# Altium PCB Mfd3.PcbDoc (part 1 of 2)
Units mm, origin at the board's own origin, x right, y up, seen from the top; angles counter-clockwise.
Board outline 190 x 263 mm, 2 copper layers (Top Layer, Bottom Layer), stack 1.671 mm thick; 173 components, 92 nets, 564 pads, 39 vias.
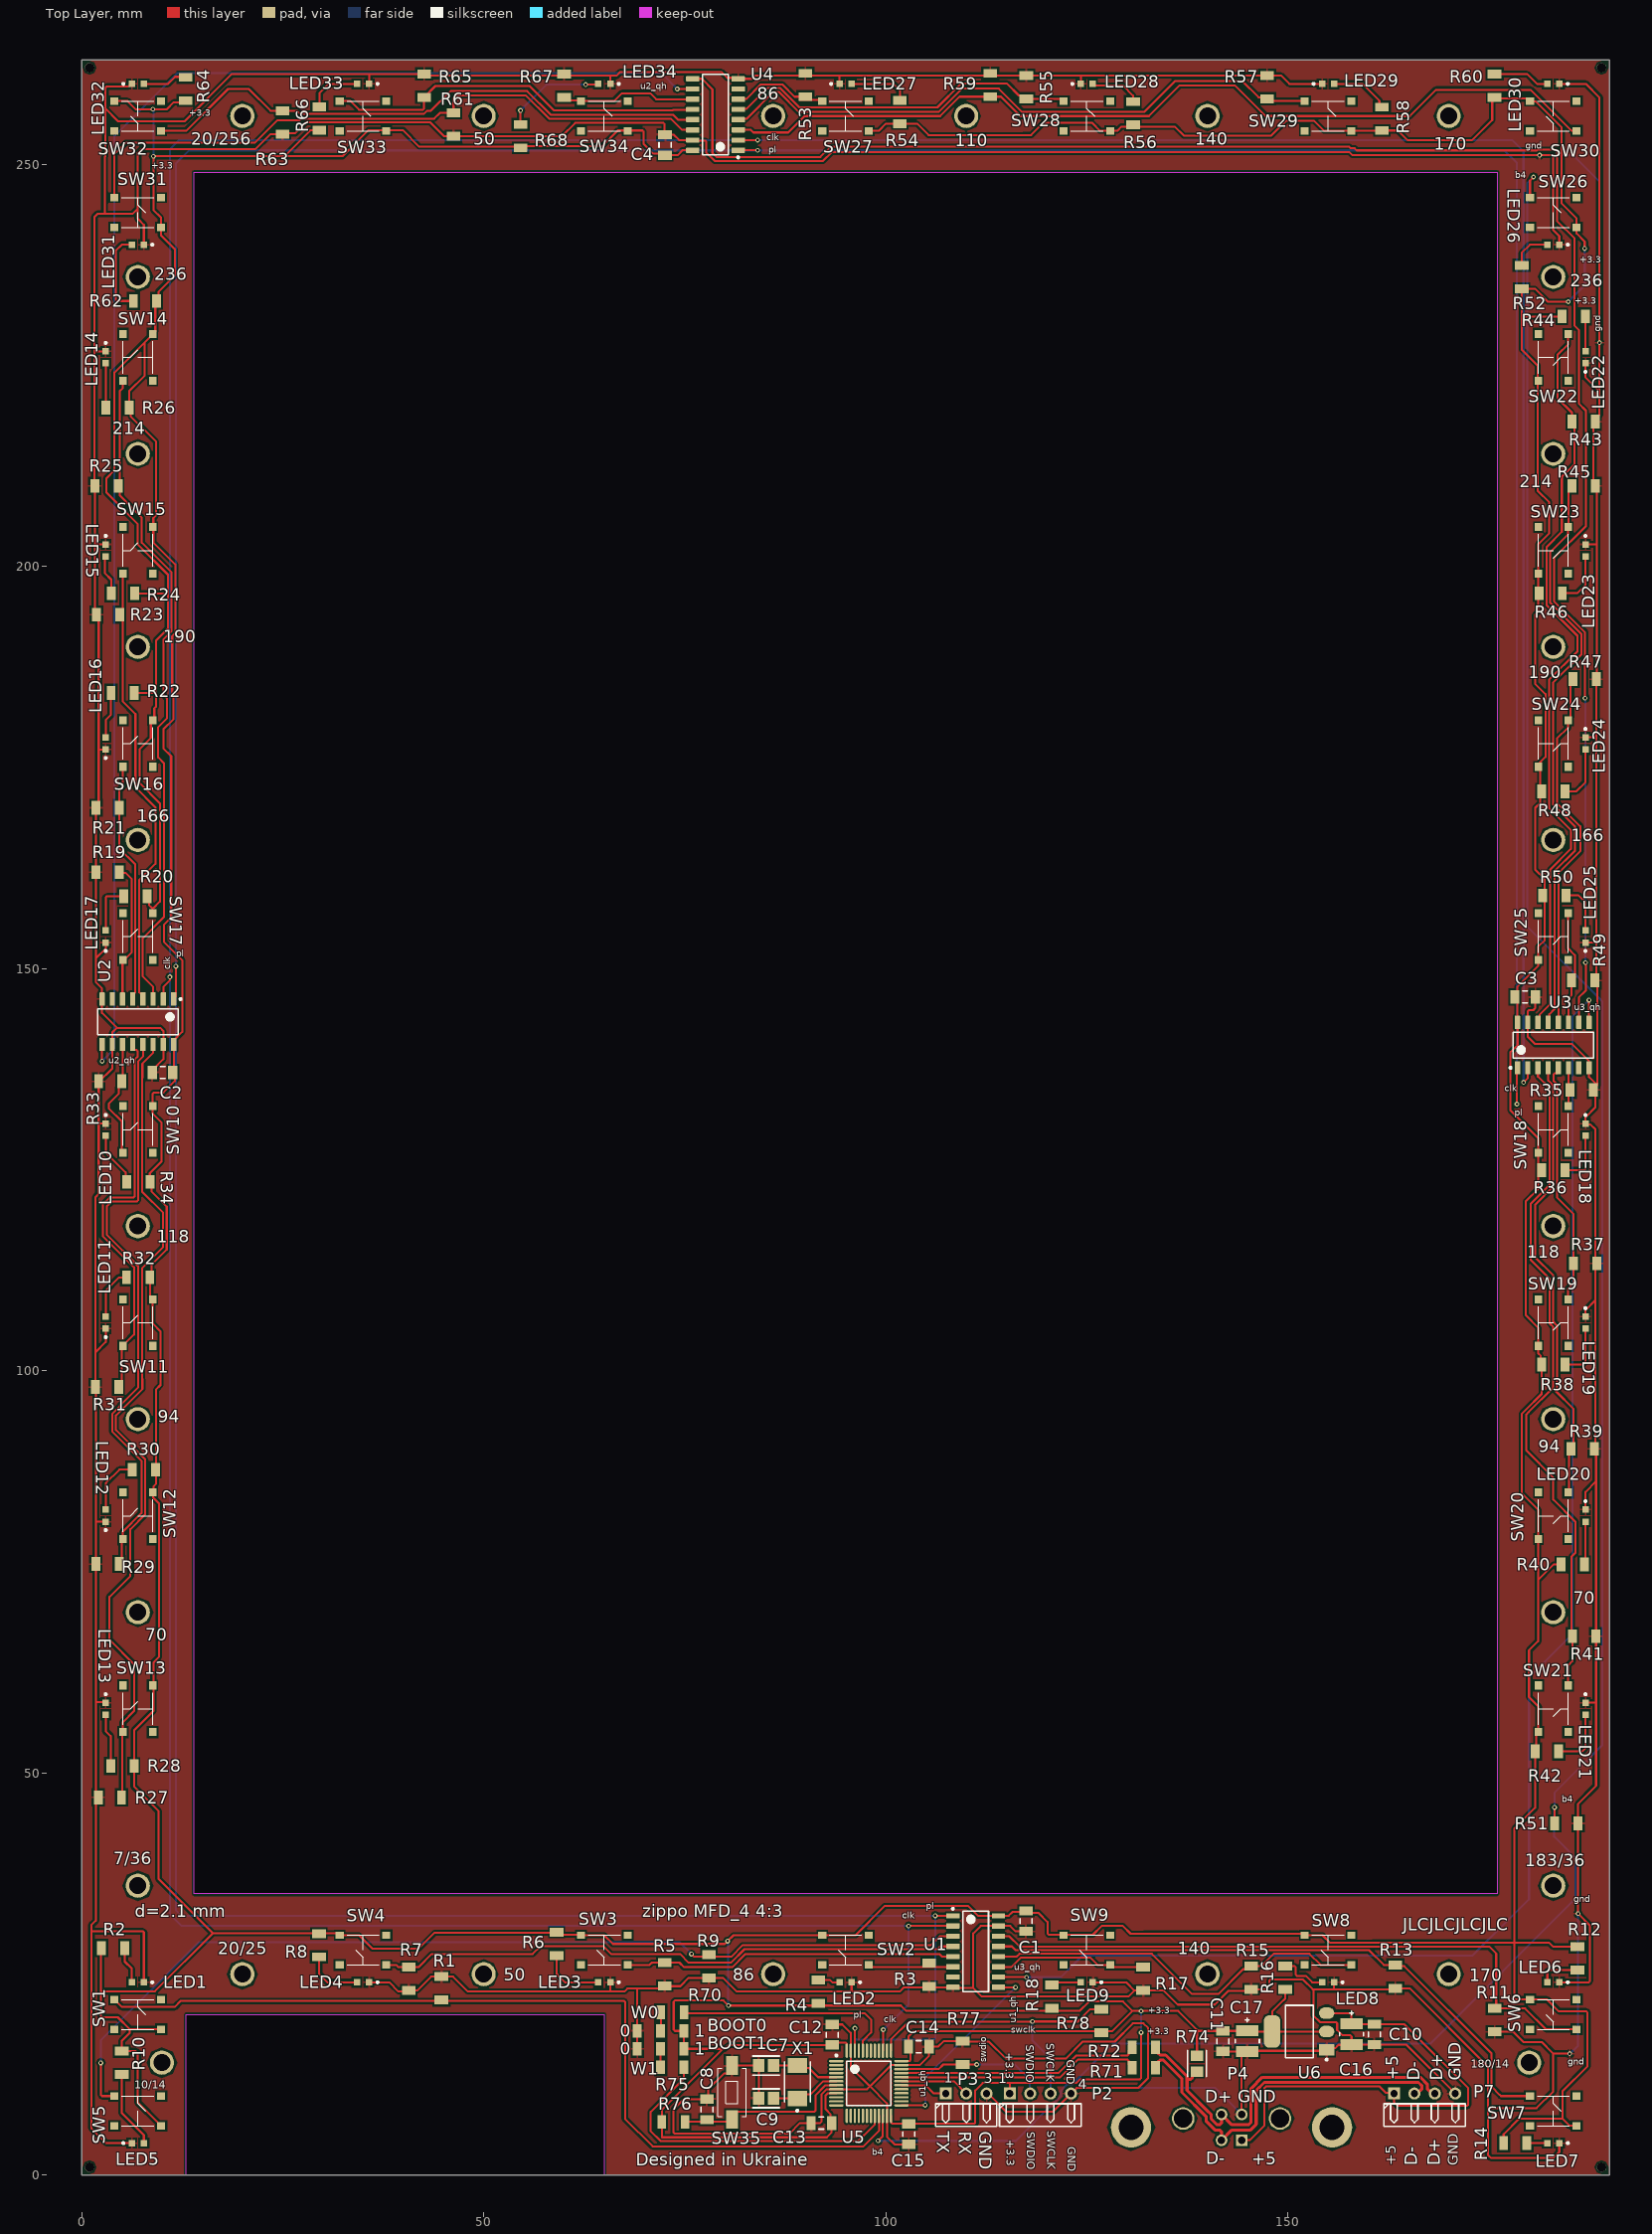
[diagram p0: Top Layer view]
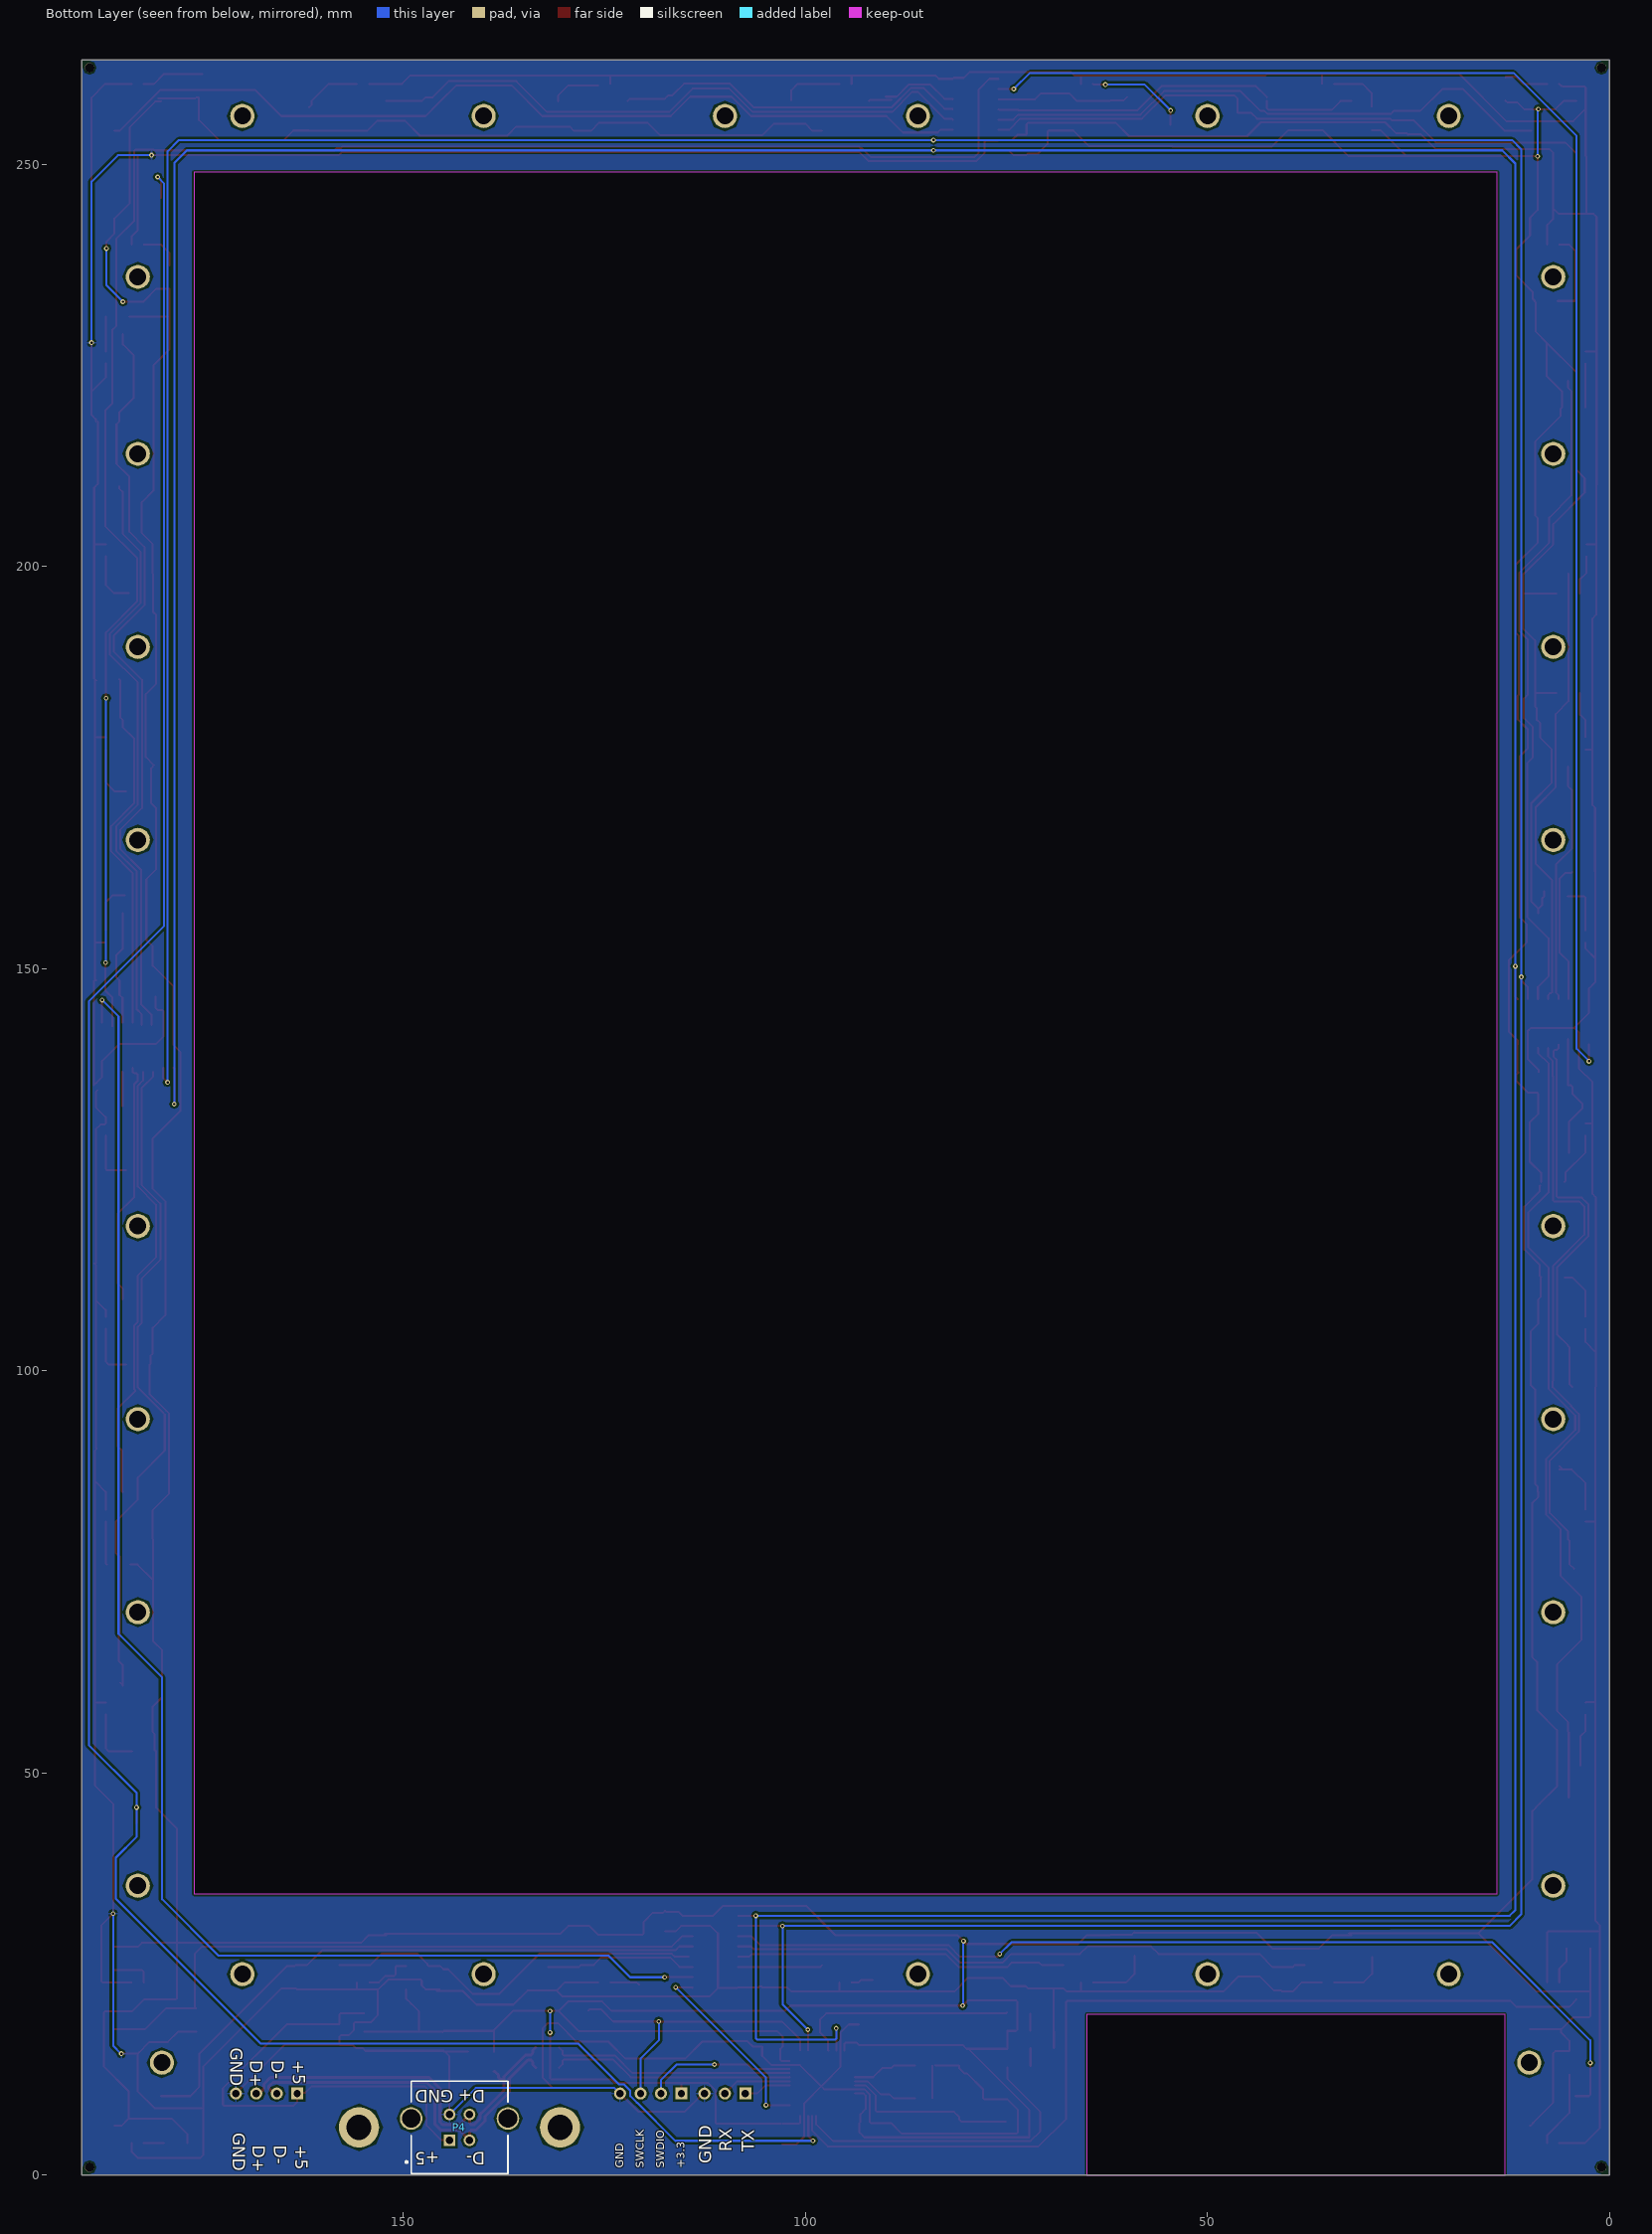
[diagram p1: Bottom Layer view, seen from below]
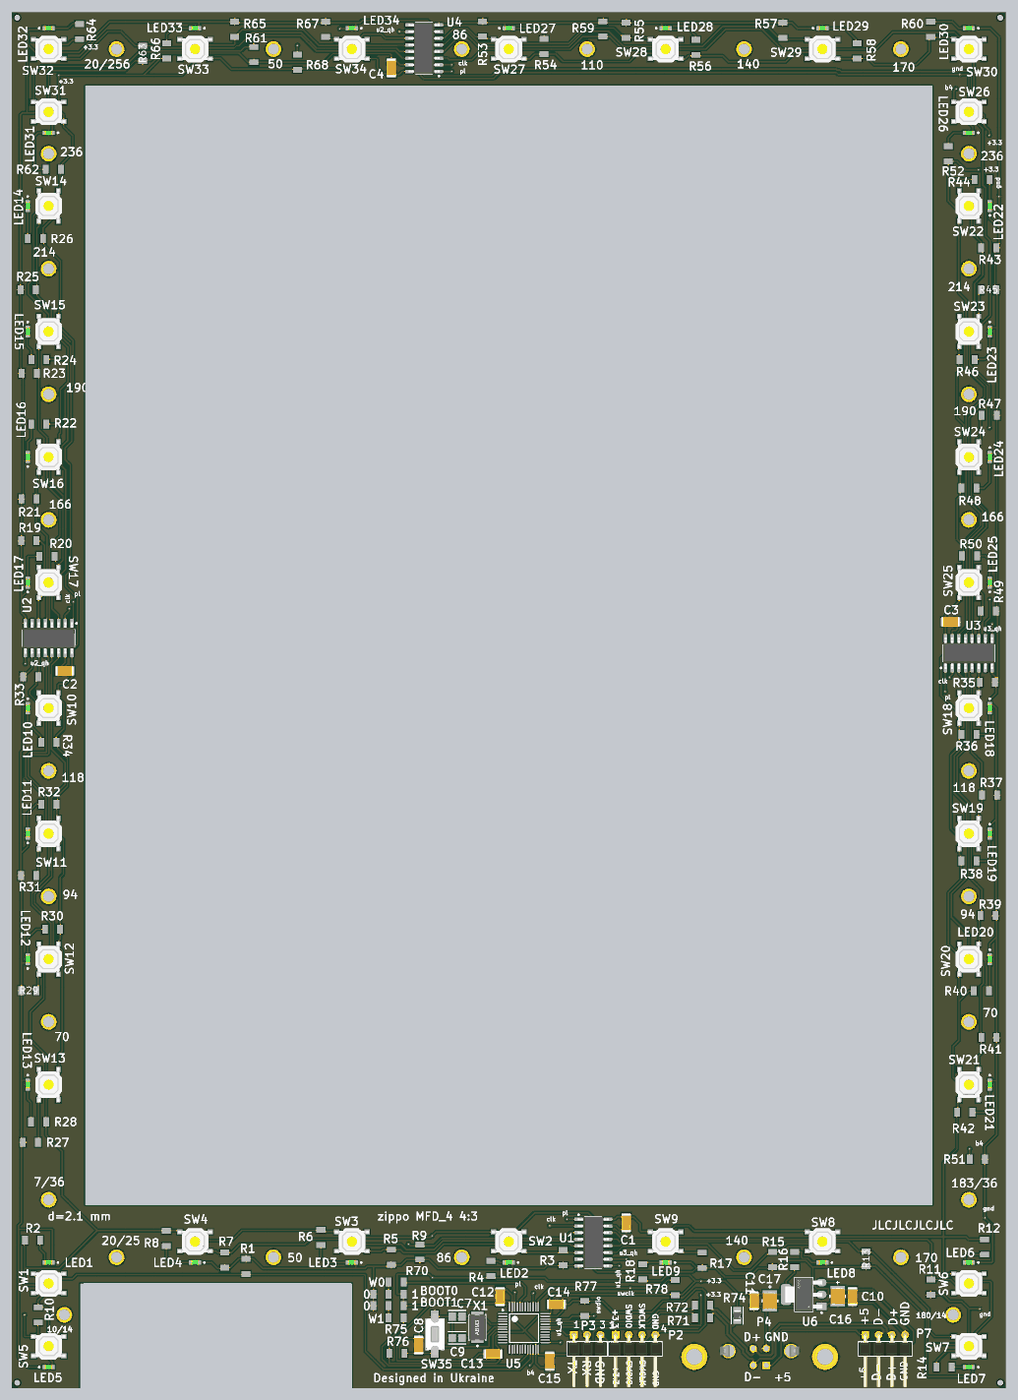
[diagram p3: 3D render of the assembled board from above, using the file's embedded part models]

## Layer stack, top to bottom
Top Solder: solder mask 0.0102, Solder Resist, Dk 3.5
Top Layer: signal copper 0.0356
Dielectric 1: dielectric 1.6, FR-4, Dk 4.8
Bottom Layer: signal copper 0.0356
Bottom Solder: solder mask 0.0102, Solder Resist, Dk 3.5

## Board outline
0,0 0,263 190,263 190,0
cut-out: 13,0 13,20 65,20 65,0
cut-out: 14,249 176,249 176,35 14,35

## Design rules (kind name [scope] priority, off if disabled: settings)
Clearance [All] p1: gap=0.254 ignorepadtopadclearanceinfootprint=FALSE except(0: Arc-Hole Track-Hole SMDPad-Hole THPad-Hole Via-Hole Fill-Hole Poly-Hole Region-Hole Text-Hole; 0.2: Arc-Arc Arc-Track Arc-SMDPad Track-Track Track-SMDPad SMDPad-SMDPad)
DiffPairsRouting [All] p1: maxlimit=0.254 minlimit=0.127 mostfreqgap=0.254 toplayer_minwidth=0.254 toplayer_maxwidth=0.381 toplayer_prefwidth=0.381 bottomlayer_minwidth=0.254 bottomlayer_maxwidth=0.381 bottomlayer_prefwidth=0.381 maxuncoupledlength=12.7
MinimumSolderMaskSliver [All] p1: minsoldermaskwidth=0.2
PolygonConnect [All] p1: connectstyle=Relief reliefconductorwidth=0.254 reliefentries=4 polygonreliefangle="90 Angle" airgapwidth=0.254
RoomDefinition Mfd3 [InComponentClass('Mfd3')] p1: confinementstyle=ConfineIn formatcopy=TRUE lockcomponents=FALSE outline -25.4,-18.4 766.953,-18.4 766.953,627.903 -25.4,627.903
RoutingVias [All] p1: holewidth=0.3 width=0.6 viastyle="Through Hole" minholewidth=0.3 minwidth=0.6 maxholewidth=0.3 maxwidth=0.6
SolderMaskExpansion [All] p1: expansion=0.102 istentingtop=FALSE
Width [All] p1: maxlimit=0.254 minlimit=0.254 preferedwidth=0.254
28 further rules are at their usual default settings.

## Classes and differential pairs
differential pair D1: +D1_P -D1_N
differential pair D: +D_P -D_N

## Components (designator, comment, footprint, x,y, rotation, side; value= is the part's Value field where it differs from the comment)
C1 "0.1 uF" 1206-CAP 117.45,31.602 r90 top
C2 "0.1 uF" 1206-CAP 10.075,137.1 r0 top
C3 "0.1 uF" 1206-CAP 179.5,146.5 r180 top
C4 "0.1 uF" 1206-CAP 72.55,252.398 r270 top
C7 "20 pF" "0805 CAP" 85.125,13.65 r180 top
C8 "1 uF" 1206-CAP 77.769,8.2 r270 top
C9 "20 pF" "0805 CAP" 85.125,9.575 r180 top
C10 "0.1 uF" 1206-CAP 160.766,17.513 r90 top
C11 "0.1 uF" 1206-CAP 141.925,16.677 r90 top
C12 "0.1 uF" 1206-CAP 93.35,17.475 r270 top
C13 "0.1 uF" 1206-CAP 92,6.5 r0 top
C14 "0.1 uF" 1206-CAP 104.1,16 r180 top
C15 "0.1 uF" 1206-CAP 102.85,5.127 r90 top
C16 "100 uF" "1210 Cap" 157.916,17.538 r90 top
C17 "100 uF" "1210 Cap" 144.95,16.675 r90 top
LED1 "LED 0603" "LED 0603" 7,24 r180 top
LED2 "LED 0603" "LED 0603" 95,24 r180 top
LED3 "LED 0603" "LED 0603" 65,24 r180 top
LED4 "LED 0603" "LED 0603" 35,24 r180 top
LED5 "LED 0603" "LED 0603" 7,4 r0 top
LED6 "LED 0603" "LED 0603" 183,24 r180 top
LED7 "LED 0603" "LED 0603" 183,4 r180 top
LED8 "LED 0603" "LED 0603" 155,24 r180 top
LED9 "LED 0603" "LED 0603" 125,24 r180 top
LED10 "LED 0603" "LED 0603" 3,130 r270 top
LED11 "LED 0603" "LED 0603" 3,106 r90 top
LED12 "LED 0603" "LED 0603" 3,82 r90 top
LED13 "LED 0603" "LED 0603" 3,58 r270 top
LED14 "LED 0603" "LED 0603" 3,226 r270 top
LED15 "LED 0603" "LED 0603" 3,202 r270 top
LED16 "LED 0603" "LED 0603" 3,178 r90 top
LED17 "LED 0603" "LED 0603" 3,154 r90 top
LED18 "LED 0603" "LED 0603" 187,130 r270 top
LED19 "LED 0603" "LED 0603" 187,106 r270 top
LED20 "LED 0603" "LED 0603" 187,82 r270 top
LED21 "LED 0603" "LED 0603" 187,58 r270 top
LED22 "LED 0603" "LED 0603" 187,226 r90 top
LED23 "LED 0603" "LED 0603" 187,202 r270 top
LED24 "LED 0603" "LED 0603" 187,178 r270 top
LED25 "LED 0603" "LED 0603" 187,154 r90 top
LED26 "LED 0603" "LED 0603" 183,240 r180 top
LED27 "LED 0603" "LED 0603" 95,260 r0 top
LED28 "LED 0603" "LED 0603" 125,260 r0 top
LED29 "LED 0603" "LED 0603" 155,260 r0 top
LED30 "LED 0603" "LED 0603" 183,260 r180 top
LED31 "LED 0603" "LED 0603" 7,240 r180 top
LED32 "LED 0603" "LED 0603" 7,260 r0 top
LED33 "LED 0603" "LED 0603" 35,260 r180 top
LED34 "LED 0603" "LED 0603" 65,260 r180 top
P2 "PLD 1X4H" "PLD 1X4H" 119.225,10.172 r0 top
P3 "PLD 1X3H" "PLD 1X3H" 110,10.172 r0 top
P4 "USB-B_Vertical" USB-B_VERTICAL 143,5.962 r0 bottom
P7 "PLD 1X4H" "PLD 1X4H" 167,10.172 r0 top
R1 "10K" 1206 44.75,23.25 r270 top
R2 "4.7K" 1206 3.925,28.25 r180 top
R3 "10K" 1206 105.4,24.925 r90 top
R4 "4.7K" 1206 91.6,22.85 r270 top
R5 "10K" 1206 72.528,25 r90 top
R6 "4.7K" 1206 59.075,28.775 r90 top
R7 "10K" 1206 40.698,24.45 r90 top
R8 "4.7K" 1206 29.525,28.6 r90 top
R9 "10K" 1206 78,26 r90 top
R10 "4.7K" 1206 5,13.983 r90 top
R11 "10K" 1206 175.725,19.3 r90 top
R12 "4.7K" 1206 186,26.959 r90 top
R13 "10K" 1206 163.35,24.7 r90 top
R14 "4.7K" 1206 178.275,4 r180 top
R15 "10K" 1206 145.425,24.575 r90 top
R16 "4.7K" 1206 149.677,24.575 r270 top
R17 "10K" 1206 132,24.415 r90 top
R18 "4.7K" 1206 120.655,22.219 r270 top
R19 "10K" 1206 3.225,162 r0 top
R20 "4.7K" 1206 6.679,159 r0 top
R21 "10K" 1206 3.25,170 r0 top
R22 "4.7K" 1206 5.119,184.286 r0 top
R23 "10K" 1206 3.3,194 r0 top
R24 "4.7K" 1206 5.15,196.65 r0 top
R25 "10K" 1206 3.096,210 r0 top
R26 "4.7K" 1206 4.468,219.751 r0 top
R27 "10K" 1206 3.525,46.975 r0 top
R28 "4.7K" 1206 5.075,50.9 r0 top
R29 "10K" 1206 3.225,76 r0 top
R30 "4.7K" 1206 7.75,87.725 r0 top
R31 "10K" 1206 3.175,98 r0 top
R32 "4.7K" 1206 7.045,111.626 r0 top
R33 "10K" 1206 3.575,136 r0 top
R34 "4.7K" 1206 7.05,123.5 r0 top
R35 "10K" 1206 186.55,134.925 r180 top
R36 "4.7K" 1206 183,124.952 r180 top
R37 "10K" 1206 186.95,113.375 r180 top
R38 "4.7K" 1206 183,100.772 r180 top
R39 "10K" 1206 186.65,90.325 r180 top
R40 "4.7K" 1206 185.4,75.931 r180 top
R41 "10K" 1206 186.825,67 r180 top
R42 "4.7K" 1206 182.225,52.7 r180 top
R43 "10K" 1206 186.775,218 r180 top
R44 "4.7K" 1206 185.525,231.075 r180 top
R45 "10K" 1206 186.775,210 r180 top
R46 "4.7K" 1206 182.675,196.672 r180 top
R47 "10K" 1206 186.9,186 r180 top
R48 "4.7K" 1206 183,172.042 r180 top
R49 "10K" 1206 186.725,148.546 r180 top
R50 "4.7K" 1206 183.15,159.106 r180 top
R51 "10K" 1206 184.625,43.75 r180 top
R52 "4.7K" 1206 179.075,235.975 r270 top
R53 "10K" 1206 90,259.85 r270 top
R54 "4.7K" 1206 101.75,256.497 r270 top
R55 "10K" 1206 117.472,259.582 r270 top
R56 "4.7K" 1206 130.747,256.337 r270 top
R57 "10K" 1206 147.423,259.583 r270 top
R58 "4.7K" 1206 161.675,255.65 r270 top
R59 "10K" 1206 113,259.85 r270 top
R60 "4.7K" 1206 175.7,259.775 r270 top
R61 "10K" 1206 46.25,254.939 r90 top
R62 "4.7K" 1206 7.9,233 r0 top
R63 "10K" 1206 25,255.2 r90 top
R64 "4.7K" 1206 12.932,259.354 r270 top
R65 "10K" 1206 42.6,259.775 r270 top
R66 "4.7K" 1206 29.576,255.67 r270 top
R67 "10K" 1206 60,259.775 r270 top
R68 "4.7K" 1206 54.581,253.489 r270 top
R70 "100K" 1206 73.475,20.253 r0 top
R71 "20" 1206 132.075,13.375 r180 top
R72 "20" 1206 132.075,15.9 r180 top
R74 "1.5K" "0805 RES" 138.7,13.875 r270 top
R75 "100K" 1206 73.45,13.425 r0 top
R76 "10K" 1206 73.6,6.65 r0 top
R77 "10K" 1206 109.55,15.225 r270 top
R78 "10K" 1206 126.8,19.202 r270 top
SW1 "TACT SWITCH 5.2mm" "TACT SWITCH 5.2mm" 7,20 r0 top
SW2 "TACT SWITCH 5.2mm" "TACT SWITCH 5.2mm" 95,28 r180 top
SW3 "TACT SWITCH 5.2mm" "TACT SWITCH 5.2mm" 65,28 r180 top
SW4 "TACT SWITCH 5.2mm" "TACT SWITCH 5.2mm" 35,28 r180 top
SW5 "TACT SWITCH 5.2mm" "TACT SWITCH 5.2mm" 7,8 r0 top
SW6 "TACT SWITCH 5.2mm" "TACT SWITCH 5.2mm" 183,20 r180 top
SW7 "TACT SWITCH 5.2mm" "TACT SWITCH 5.2mm" 183,8 r0 top
SW8 "TACT SWITCH 5.2mm" "TACT SWITCH 5.2mm" 155,28 r180 top
SW9 "TACT SWITCH 5.2mm" "TACT SWITCH 5.2mm" 125,28 r180 top
SW10 "TACT SWITCH 5.2mm" "TACT SWITCH 5.2mm" 7,130 r90 top
SW11 "TACT SWITCH 5.2mm" "TACT SWITCH 5.2mm" 7,106 r90 top
SW12 "TACT SWITCH 5.2mm" "TACT SWITCH 5.2mm" 7,82 r90 top
SW13 "TACT SWITCH 5.2mm" "TACT SWITCH 5.2mm" 7,58 r90 top
SW14 "TACT SWITCH 5.2mm" "TACT SWITCH 5.2mm" 7,226 r90 top
SW15 "TACT SWITCH 5.2mm" "TACT SWITCH 5.2mm" 7,202 r90 top
SW16 "TACT SWITCH 5.2mm" "TACT SWITCH 5.2mm" 7,178 r90 top
SW17 "TACT SWITCH 5.2mm" "TACT SWITCH 5.2mm" 7,154 r90 top
SW18 "TACT SWITCH 5.2mm" "TACT SWITCH 5.2mm" 183,130 r270 top
SW19 "TACT SWITCH 5.2mm" "TACT SWITCH 5.2mm" 183,106 r270 top
SW20 "TACT SWITCH 5.2mm" "TACT SWITCH 5.2mm" 183,82 r270 top
SW21 "TACT SWITCH 5.2mm" "TACT SWITCH 5.2mm" 183,58 r270 top
SW22 "TACT SWITCH 5.2mm" "TACT SWITCH 5.2mm" 183,226 r270 top
SW23 "TACT SWITCH 5.2mm" "TACT SWITCH 5.2mm" 183,202 r270 top
SW24 "TACT SWITCH 5.2mm" "TACT SWITCH 5.2mm" 183,178 r270 top
SW25 "TACT SWITCH 5.2mm" "TACT SWITCH 5.2mm" 183,154 r270 top
SW26 "TACT SWITCH 5.2mm" "TACT SWITCH 5.2mm" 183,244 r0 top
SW27 "TACT SWITCH 5.2mm" "TACT SWITCH 5.2mm" 95,256 r0 top
SW28 "TACT SWITCH 5.2mm" "TACT SWITCH 5.2mm" 125,256 r0 top
SW29 "TACT SWITCH 5.2mm" "TACT SWITCH 5.2mm" 155,256 r0 top
SW30 "TACT SWITCH 5.2mm" "TACT SWITCH 5.2mm" 183,256 r180 top
SW31 "TACT SWITCH 5.2mm" "TACT SWITCH 5.2mm" 7,244 r0 top
SW32 "TACT SWITCH 5.2mm" "TACT SWITCH 5.2mm" 7,256 r180 top
SW33 "TACT SWITCH 5.2mm" "TACT SWITCH 5.2mm" 35,256 r0 top
SW34 "TACT SWITCH 5.2mm" "TACT SWITCH 5.2mm" 65,256 r0 top
SW35 "" PUSHBUTTON 80.875,10.3 r90 top
U1 "74HC165D,653" SOIC-16 111.178,27.821 r270 top
U2 "74HC165D,653" SOIC-16 7,143.4 r180 top
U3 "74HC165D,653" SOIC-16 183,140.5 r0 top
U4 "74HC165D,653" SOIC-16 78.822,256.179 r90 top
U5 "STM32F103C8T6" STM-LQFP48_N 97.9,11.45 r270 top
U6 "AMS1117-3.3" FP-AMS1117-IPC_A 151.43,17.875 r0 top
W0 "0R" 1206 70.556,17.95 r0 top
W1 "0R" 1206 70.556,15.725 r0 top
X1 "8MHz" ABRA-ABM3-2_V 89,11.6 r90 top

## Footprints (in the part's own frame and the unit in brackets; to place one, negate y for a bottom-side part, rotate by r counter-clockwise, add the part's x,y. Pads: shape width x height; smd on the part's side, far side on the other; paste and mask are expansions set on the pad)
"0805 CAP" [mm]
  rect 1.455x1.556 smd paste+0 mask+0: 1(-0.926,0) 2(0.926,0)
  silkscreen extent -1.65,-1.18 1.65,1.18, body extent -2.15,-1.28 2.15,1.28, height 0.25
"0805 RES" [mm]
  rect 1.306x1.508 smd paste+0 mask+0: 1(-0.976,0) 2(0.976,0)
  silkscreen extent -1.63,-1.15 1.63,1.15, body extent -2.13,-1.25 2.13,1.25, height 0.25
1206 [mm]
  rect 1.1x1.7 smd: 1(-1.45,0) 2(1.45,0)
  body extent -1.65,-0.85 1.65,0.85, height 0.6
1206-CAP [mm] "Chip Capacitor, 2-Leads, Body 3.4x1.8mm, IPC High Density"
  rect 1.15x1.7 smd: 1(-1.275,0) 2(1.275,0)
  silkscreen extent -0.3,-0.75 0.3,0.75, body extent -1.7,-0.9 1.7,0.9, height 1.8
"1210 Cap" [mm]
  rect 1.4x2.8 smd paste+0 mask+0: 1(1.3,0) 2(-1.3,0)
  silkscreen extent -0.23,-1.5 2.9,1.5, body extent -2.1,-1.6 2.1,1.6, height 0.25
ABRA-ABM3-2_V [mm] "SMD, 2-Leads, Body 5x3.2mm, Pitch 4.1mm"
  rect 1.9x2.4 smd: 1(-2.05,0) 2(2.05,0)
  silkscreen extent -3.67,-1.6 2.5,1.6, body extent -2.5,-1.6 2.5,1.6, height 1.3
FP-AMS1117-IPC_A [mm]
  rect 1.9x1.4 smd paste+0 mask+0: 1(3.395,-2.29)
  rrect100% 1.9x1.4 smd paste+0 mask+0: 2(3.395,0) 3(3.395,2.29)
  rrect59% 2x4 smd paste+0 mask+0: 4(-3.395,0)
  silkscreen extent -1.75,-3.62 3.52,3.25, body extent -4.7,-3.75 4.7,3.75, height 0.25
"LED 0603" [mm]
  rect 0.8x0.8 smd paste+0 mask+0: 1(0.75,0) 2(-0.75,0)
  silkscreen extent -1.92,-0.12 -1.68,0.12, body extent -1.25,-0.55 1.25,0.55, height 0.25
"PLD 1X3H" [mm] "Connector; Header; 3x1 Position; Right Angle"
  rect 1.5x1.5 hole 0.9: 1(-2.54,0)
  round 1.5 hole 0.9: 2(0,0) 3(2.54,0)
  silkscreen extent -3.82,-4.08 3.81,-1.27, body extent -3.81,-10.04 3.81,0.32, height 2.54
"PLD 1X4H" [mm] "Connector; Header; 4x2 Position; Right Angle"
  rect 1.5x1.5 hole 0.9: 1(-3.81,0)
  round 1.5 hole 0.9: 2(-1.27,0) 3(1.27,0) 4(3.81,0)
  silkscreen extent -5.09,-4.08 5.09,-1.27, body extent -5.08,-10.04 5.08,0.32, height 2.54
PUSHBUTTON [mm] "6.0*3.5mm vertical type, SMD, height 5.0mm, black actuator, 160gf, T&R"
  rect 2.3x1.5 smd: 1(-3.35,0) 2(3.35,0)
  silkscreen extent -3,-1.75 3,1.75, body extent -4,-1.75 4,1.75, height 5
SOIC-16 [mm] "SOIC, 16-Leads, Body 10x4mm, Pitch 1.27mm, IPC Low Density"
  rrect15% 0.65x1.65 smd: 1(-4.445,-2.825) 2(-3.175,-2.825) 3(-1.905,-2.825) 4(-0.635,-2.825) 5(0.635,-2.825) 6(1.905,-2.825) 7(3.175,-2.825) 8(4.445,-2.825) 9(4.445,2.825) 10(3.175,2.825) 11(1.905,2.825) 12(0.635,2.825) 13(-0.635,2.825) 14(-1.905,2.825) 15(-3.175,2.825) 16(-4.445,2.825)
  silkscreen extent -5.44,-2.95 5,1.6, body extent -4.95,-3 4.95,3, height 1.59
STM-LQFP48_N [mm] "QFP, 48-Leads, Body 7x7mm, Pitch 0.5mm, IPC Medium Density"
  oval 0.3x1.8 smd: 1(-2.75,-4.05) 2(-2.25,-4.05) 3(-1.75,-4.05) 4(-1.25,-4.05) 5(-0.75,-4.05) 6(-0.25,-4.05) 7(0.25,-4.05) 8(0.75,-4.05) 9(1.25,-4.05) 10(1.75,-4.05) 11(2.25,-4.05) 12(2.75,-4.05) 25(2.75,4.05) 26(2.25,4.05) 27(1.75,4.05) 28(1.25,4.05) 29(0.75,4.05) 30(0.25,4.05) 31(-0.25,4.05) 32(-0.75,4.05) 33(-1.25,4.05) 34(-1.75,4.05) 35(-2.25,4.05) 36(-2.75,4.05)
  oval 1.8x0.3 smd: 13(4.05,-2.75) 14(4.05,-2.25) 15(4.05,-1.75) 16(4.05,-1.25) 17(4.05,-0.75) 18(4.05,-0.25) 19(4.05,0.25) 20(4.05,0.75) 21(4.05,1.25) 22(4.05,1.75) 23(4.05,2.25) 24(4.05,2.75) 37(-4.05,2.75) 38(-4.05,2.25) 39(-4.05,1.75) 40(-4.05,1.25) 41(-4.05,0.75) 42(-4.05,0.25) 43(-4.05,-0.25) 44(-4.05,-0.75) 45(-4.05,-1.25) 46(-4.05,-1.75) 47(-4.05,-2.25) 48(-4.05,-2.75)
  silkscreen extent -3.57,-4.17 2.75,2.75, body extent -3.5,-3.5 3.5,3.5, height 1.6
"TACT SWITCH 5.2mm" [mm]
  rect 1x0.9 smd: 1(-2.9,1.85) 2(2.9,1.85) 3(-2.9,-1.85) 4(2.9,-1.85)
  silkscreen extent -2,-1.85 2,1.85, body extent -3.25,-2.54 3.25,2.54, height 1.52
USB-B_VERTICAL [mm] "THD, 4-Leads, Body 12.03x11.46mm, Pitch 2.5mm"
  rect 1.45x1.45 hole 0.92: 1(1.25,1.605)
  round 1.45 hole 0.92: 2(-1.25,1.605) 3(-1.25,-1.605) 4(1.25,-1.605)
  round 2.8 hole 2.3: 5(6.02,-1.1) 6(-6.02,-1.1)
  silkscreen extent -6.01,-5.73 6.73,5.73, body extent -7.57,-5.73 7.57,5.73, height 15.62

## Part data
C1 C2 C3 C4 C10 C11 C12 C13 C14 C15: library part Capacitor, "Chip Capacitor, 1206", LCSC Part #=C24497
C7 C9: library part Capacitor, "Chip Capacitor, 1206", LCSC Part #=C1798
C8: library part Capacitor, "Chip Capacitor, 1206", LCSC Part #=C1848
C16 C17: library part "Capacitor Tantalum", "Tantalum Capacitor, 1210", LCSC Part #=C16133
LED1 LED2 LED3 LED4 LED5 LED6 LED7 LED8 LED9 LED10 LED11 LED12 LED13 LED14 LED15 LED16 LED17 LED18 LED19 LED20 LED21 LED22 LED23 LED24 LED25 LED26 LED27 LED28 LED29 LED30 LED31 LED32 LED33 LED34: LCSC Part #=C72043
P2 P7: "Header, 4-Pin, SIngle row, Right Angle"
P3: "Header, 3-Pin, SIngle row, Right Angle"
R1 R3 R5 R7 R9 R11 R13 R15 R17 R19 R21 R23 R25 R27 R29 R31 R33 R35 R37 R39 R41 R43 R45 R47 R49 R51 R53 R55 R57 R59 R61 R63 R65 R67 R76 R77 R78: library part Resistor, "Resistor 1206", LCSC Part #=C17902
R2 R4 R6 R8 R10 R12 R14 R16 R18 R20 R22 R24 R26 R28 R30 R32 R34 R36 R38 R40 R42 R44 R46 R48 R50 R52 R54 R56 R58 R60 R62 R64 R66 R68: library part Resistor, "Resistor 1206", LCSC Part #=C17936
R70 R75: library part Resistor, "Resistor 1206", LCSC Part #=C17900
R71 R72: library part Resistor, "Resistor 1206", LCSC Part #=C17955
R74: library part Resistor1, "Resistor 0805", LCSC Part #=C4310
SW1 SW2 SW3 SW4 SW5 SW6 SW7 SW8 SW9 SW10 SW11 SW12 SW13 SW14 SW15 SW16 SW17 SW18 SW19 SW20 SW21 SW22 SW23 SW24 SW25 SW26 SW27 SW28 SW29 SW30 SW31 SW32 SW33 SW34: "Push button 5.2 mm", LCSC Part #=C412369
SW35: library part Pushbutton, "WS-TASV SMD Tact Switch 6.0X3.5 mm", Manufacturer="Wuerth Elektronik", PartNumber=434121050816, ComponentLink1Description="Manufacturer URL", ComponentLink1URL=http://www.we-online.com, ComponentLink2Description=Datasheet, ComponentLink2URL=http://katalog.we-online.de/em/datasheet/434121050816.pdf, NoPins=02, PackageReference=434121050816
U1 U2 U3 U4: library part 74HC165, "8-Bit Parallel-Load Shift Registers, SOIC-16, LARGE T&R", LCSC Part #=C5613
U5: "ARM Cortex-M3 32-bit MCU, 64 KB Flash, 20 KB Internal RAM, 37 I/Os, 48-pin LQFP, -40 to 85 degC, Tray", LCSC Part #=C8734
U6: "LDO Voltage Regulators 1A, 3.3V", LCSC Part #=C6186, ComponentLink2Description=Datasheet, ComponentLink2URL=http://www.advanced-monolithic.com/pdf/ds1117.pdf
W0 W1: library part Resistor, "Resistor 1206", LCSC Part #=C17888
X1: "Miniature Ceramic Crystal, 8 MHz, -40 to 85 degC, 2-Pin SMD, RoHS, Tape and Reel", LCSC Part #=C115962

## Free pads (board coordinates)
  round 5 hole 3.1: 2(130.5,5.962) 3(155.5,5.962)
  round 3 hole 2.1: 3(7,36) 3(7,236) 3(7,70) 3(7,94) 3(7,118) 3(7,166) 3(7,190) 3(7,214) 3(10,14) 3(20,25) 3(20,256) 3(50,25) 3(50,256) 3(86,25) 3(86,256) 3(110,256) 3(140,25) 3(140,256) 3(170,25) 3(170,256) 3(180,14) 3(183,36) 3(183,70) 3(183,94) 3(183,118) 3(183,166) 3(183,190) 3(183,214) 3(183,236)
  rect 1.1x1.7 smd: 5(74.9,15.725) 5(74.9,17.95)
  round 1.152 hole 1.152 unplated paste+1.152 mask+0.148: H(1,1) H(1,262) H(189,1) H(189,262)

## Via types
v1: diameter 0.6, hole 0.3, Top Layer to Bottom Layer, tented both sides, 39 vias

## Nets (pads, with @x,y where several pads share a name; then routed paths per layer and width w, separated by ;. In a path a pad name is that pad's centre, name@x,y a point inside that pad or via, vN(x,y) a via of type N, cw(c..) or ccw(c..) an arc to the next point about the centre after c; other vN are vias at no path point)
+3.3: C1.2 C2.2 C3.2 C4.2 C11.2 C12.2 C13.2 C14.2 C15.2 C17.1 P2.1 pad.5 R2.2 R4.2 R6.2 R8.2 R10.2 R12.2 R14.2 R16.2 R18.2 R20.2 R22.2 R24.2 R26.2 R28.2 R30.2 R32.2 R34.2 R36.2 R38.2 R40.2 R42.2 R44.2 R46.2 R48.2 R50.2 R52.2 R54.2 R56.2 R58.2 R60.2 R62.2 R64.2 R66.2 R68.2 R74.1 R76.1 R78.2 SW1.4 SW2.4 SW3.4 SW4.4 SW5.4 SW6.4 SW7.4 SW8.4 SW9.4 SW10.4 SW11.4 SW12.4 SW13.4 SW14.4 SW15.4 SW16.4 SW17.4 SW18.4 SW19.4 SW20.4 SW21.4 SW22.4 SW23.4 SW24.4 SW25.4 SW26.4 SW27.4 SW28.4 SW29.4 SW30.4 SW31.4 SW32.4 SW33.4 SW34.4 U1.16 U2.16 U3.16 U4.16 U5.9 U5.24 U5.36 U5.48 U6.2 U6.4 | length 1296.8
  Top Layer w0.254: R2.2@2.4,28.25 2.4,22.884 ; SW32.4@4.1,257.85 5.725,257.85 6.725,256.85 v1(8.856,256.85) 10.625,256.85 11.479,257.704 12.732,257.704 R64.2@12.932,257.904 ; R22.2@6.569,184.286 9.267,184.286 ; R24.2@6.6,196.65 10.755,196.65 ; R20.2@8.129,159.625 R20.2@8.129,159 8.382,158.747 8.382,157.918 8.85,157.45 ; R34.2@8.495,123.5 8.495,124.575 9.925,126.005 9.925,130.9 8.85,131.975 SW10.4@8.85,132.9 8.85,134.451 8.999,134.6 10.175,134.6 11.593,136.018 11.593,136.857 C2.2@11.35,137.1 11.5,137.25 U2.16@11.5,140.575 ; R34.2@8.662,123.042 8.695,123.009 8.695,122.314 10.594,120.415 10.594,115.094 8.695,113.195 8.695,111.826 R32.2@8.495,111.626 8.55,111.57 8.55,109.2 SW11.4@8.85,108.9 8.85,105.875 9.825,104.9 9.825,98.25 9.25,97.675 9.25,87.725 9.25,85.94 8.942,85.632 8.942,84.992 SW12.4@8.85,84.9 ; SW17.4@8.85,156.9 8.85,157.45 ; SW12.4@8.9,84.9 8.9,84.275 9.627,83.548 9.627,64.427 8.975,63.775 8.975,60.9 8.975,57.775 6.55,55.35 6.55,50.925 R28.2@6.525,50.9 6.525,48.35 8.7,46.175 9.6,45.275 9.6,36.832 16.341,30.091 ; R62.2@9.312,233.037 9.557,233.282 9.557,234.132 11.625,236.2 11.625,239.4 9.9,241.125 SW31.4@9.9,242.15 ; R62.2@9.35,233 9.175,232.825 9.175,229.175 7.825,227.825 ; SW5.4@9.9,6.15 9.85,6.15 9.527,6.473 9.527,6.523 7,9.05 7,15.183 6.75,15.433 R10.2@5,15.433 5,16.717 6.01,17.727 6.01,18.15 ; SW1.4@9.9,18.15 6.01,18.15 ; SW31.4@9.9,242.2 9.9,243.35 8.95,244.3 v1(8.95,250.993) 25.227,250.993 ; U2.16@11.445,140.575 11.445,141.075 12.525,142.155 12.525,151.05 10.28,153.295 10.28,155.488 11.15,156.358 11.15,176.425 10.175,177.4 10.175,179.761 11.445,181.031 11.445,183.922 11.273,184.094 11.273,191.335 11.663,191.725 11.663,200.25 8.925,202.988 8.925,206.009 9.275,206.359 9.275,215.5 6.106,218.669 6.106,219.564 R26.2@5.918,219.751 5.918,221.782 7.825,223.688 7.825,227.825 ; R66.2@29.576,254.22 28.454,254.22 25.227,250.993 ; SW4.4@32.1,29.85 34.494,29.85 36.153,28.191 41.943,28.191 43.92,30.168 R6.2@59.075,30.168 ; SW4.4@32.391,30.091 29.525,30.091 16.341,30.091 ; R6.2@59.075,30.225 59.375,29.925 62.025,29.925 SW3.4@62.1,29.85 65,29.85 66.088,28.762 79.98,28.762 v1(80.336,29.118) 81.068,29.85 SW2.4@92.1,29.85 96.254,29.85 99.904,33.5 110.22,33.5 111.454,32.266 U1.16@114.003,32.266 115.291,32.266 115.775,32.75 117.322,32.75 C1.2@117.45,32.877 117.677,32.65 118.95,32.65 120.114,31.486 120.114,30.054 120.262,29.905 125.755,29.905 126.85,31 129.475,31 130.45,30.025 132,30.025 ; U4.16@75.997,251.734 74.709,251.734 74.098,251.123 C4.2@72.55,251.123 72.323,251.35 71.05,251.35 69.886,252.514 69.886,254.051 69.738,254.2 66.68,254.2 64.705,252.225 54.375,252.225 54.332,252.182 42.008,252.182 39.939,254.25 35.7,254.25 32.443,250.993 25.227,250.993 ; U5.9@93.85,10.2 93.841,10.191 92.783,10.191 92.508,9.916 92.508,8.222 93.148,7.582 93.148,6.627 C13.2@93.275,6.5 93.275,5.325 92.671,4.721 72.175,4.721 72.175,6.625 R76.1@72.15,6.65 72.15,8.125 79.75,15.725 ; U5.48@95.15,15.5 95.141,15.509 95.141,16.351 94.978,16.514 93.664,16.514 C12.2@93.35,16.2 80.442,16.2 79.967,15.725 79.75,15.725 ; SW27.4@97.9,254.15 99.124,254.15 100.021,255.047 R54.2@101.75,255.047 103.889,255.047 105.317,253.619 117,253.619 117.013,253.632 118.082,253.632 119.625,255.175 125.629,255.175 126.654,254.15 SW28.4@127.9,254.15 128.775,254.15 129.312,254.687 135.938,254.687 137.075,253.55 147.925,253.55 149.765,255.39 153.26,255.39 154.5,254.15 SW29.4@157.95,254.15 ; U5.24@100.65,7.4 100.65,6.551 100.799,6.402 C15.2@102.85,6.402 ; U5.36@101.95,14.2 102.951,14.2 103.1,14.349 103.1,15.725 C14.2@102.825,16 102.825,17.25 103.475,17.9 128.15,17.9 130.675,20.425 ; C15.2@103.088,6.402 111.026,6.402 111.131,6.508 111.131,10.539 112.067,11.475 115.415,11.475 ; P2.1@115.415,10.172 115.415,11.475 ; v1(131.75,17.75) 131.75,12.099 131.601,11.95 124.173,11.95 123.698,11.475 115.415,11.475 ; 132.026,30.024 SW8.4@152.324,30.024 ; R74.1@138.7,15.325 138.7,18.089 ; C17.1@145.053,17.825 144.927,17.952 C11.2@141.925,17.952 138.838,17.952 136.364,20.425 v1(131.75,20.425) 130.675,20.425 ; C17.1@145.103,17.875 U6.4@148.035,17.875 ; R16.2@149.677,23.125 149.677,22 149.003,21.325 148.035,20.357 U6.4@148.035,17.875 ; SW8.4@152.1,29.85 154.3,29.85 155.249,28.901 160.458,28.901 ; U6.2@154.825,17.875 U6.4@148.035,17.875 ; SW29.4@157.9,254.15 SW29.4@157.95,254.15 ; 160.459,28.9 178.142,28.9 ; R14.2@176.825,4 176.825,5.11 178.775,7.06 184.135,7.06 ; U3.16@178.544,143.325 178.544,147.769 181.15,150.375 SW25.4@181.15,151.1 181.15,152.764 181.939,153.554 181.939,161.126 180.75,162.316 180.75,170 181.35,170.6 181.35,174.9 SW24.4@181.15,175.1 ; U3.16@178.555,143.325 178.555,140.5 177.68,139.625 177.68,132.37 181.15,128.9 181.15,122.643 179.575,121.068 179.575,106.925 181.15,105.35 SW19.4@181.15,103.1 181.15,102.144 181.44,101.854 181.44,100.881 R38.2@181.55,100.772 181.55,97.142 179.471,95.063 179.471,95.061 179.1,94.69 179.1,84.75 181.15,82.7 SW20.4@181.15,79.1 181.1,79.05 181.1,74 ; SW30.4@180.1,257.85 180.157,257.793 180.832,257.793 184,254.625 184,245.175 185.9,243.275 SW26.4@185.9,242.15 185.9,241.391 186.9,240.391 v1(186.9,239.53) ; SW30.4@180.462,258.162 175.862,258.162 R60.2@175.7,258.325 175.408,258.325 175.408,255.497 172.915,253.004 164.846,253.004 163.65,254.2 R58.2@161.675,254.2 161.625,254.15 SW29.4@157.95,254.15 ; R42.2@180.725,52.775 180.725,45.675 178.142,43.092 178.142,28.9 ; R42.2@180.775,52.7 180.9,52.825 180.9,54.85 SW21.4@181.15,55.1 181.15,58.273 179.976,59.446 179.976,65.276 181.1,66.4 181.1,74 ; SW24.4@181,175.3 182.025,176.325 182.025,184.125 180.725,185.425 180.725,193.975 181.1,194.35 181.1,199.05 SW23.4@181.15,199.1 181.15,202.8 182.5,204.15 182.5,207.975 181.05,209.425 181.05,225 179.075,226.975 179.075,231.175 ; R40.2@183.95,75.931 183.031,75.931 181.1,74 ; R44.2@184.075,231.075 179.175,231.075 179.075,231.175 ; v1(184.864,232.906) 182.319,232.906 180.7,234.525 R52.2@179.075,234.525 179.075,231.175 ; SW7.4@185.9,6.15 185.045,6.15 184.135,7.06 ; R12.2@186,28.409 183,28.409 182.509,28.9 178.142,28.9 ; 2.4,22.884 2.4,19.799 2.549,19.65 4.51,19.65 6.01,18.15 ; 2.4,22.884 9.135,22.884 16.341,30.091 ; 7.825,227.825 4.101,224.101 4.101,211.976 3.096,210.971 3.096,209.179 7,205.275 7,202.731 10.755,198.976 10.755,196.65 10.755,192.299 9.268,190.811 9.268,184.287 ; 8.85,157.45 9.748,158.348 9.748,170.552 7.2,173.1 7.2,177.275 8.618,178.693 8.618,180.527 8.991,180.9 9.05,180.9 9.05,182.375 9.268,182.593 9.268,184.287 ; 9.267,184.286 9.268,184.287 ; 79.75,15.725 pad.5@74.9,15.725 pad.5@74.9,17.95 73.8,17.95 73.625,18.125 73.625,21.576 73.774,21.725 79.817,21.725 v1(80.442,21.1) 101.875,21.1 102.5,20.475 124.141,20.475 125.266,21.6 129.5,21.6 130.675,20.425 ; 178.142,28.9 178.142,21.999 178.291,21.85 SW6.4@180.1,21.85 182.233,21.85 183.708,20.375 187.101,20.375 187.25,20.226 187.25,13.557 184.135,10.442 184.135,7.06
  Bottom Layer w0.254: v1(8.856,256.85) 8.95,256.756 v1(8.95,250.993) ; v1(80.336,29.118) 80.389,29.064 80.389,21.153 v1(80.442,21.1) ; v1(131.75,17.75) v1(131.75,20.425) ; v1(184.864,232.906) 186.9,234.942 v1(186.9,239.53)
+5: C10.2 C16.1 P4.1 P7.1 U6.3 | length 59.5
  Top Layer w0.254: P4.1@144.25,4.357 145.257,4.357 147.1,6.2 147.1,10.841 147.291,11.032 161.406,11.032 162.208,10.231 163.131,10.231 P7.1@163.19,10.172 163.19,9.119 163.684,8.625 172.275,8.625 172.424,8.774 172.424,10.826 164.462,18.788 C10.2@160.766,18.788 157.966,18.788 157.911,18.844 157.911,20.016 157.762,20.165 U6.3@154.825,20.165
B4: R51.2 SW26.1 U5.22 | length 329.4
  Top Layer w0.254: v1(99.044,4.294) 99.627,4.877 99.627,7.377 U5.22@99.65,7.4 ; SW26.1@180.1,245.85 180.1,247.98 v1(180.54,248.42) ; v1(183.15,45.732) 183.15,43.775 R51.2@183.175,43.75
  Bottom Layer w0.254: v1(99.044,4.294) 116.169,4.294 120.916,9.041 120.963,9.041 121.765,9.843 121.765,10.502 122.567,11.303 123.178,11.303 128.252,16.377 167.727,16.377 185.742,34.392 185.742,39.486 183.125,42.103 183.125,45.707 v1(183.15,45.732) 183.15,47.55 189.1,53.5 189.1,145.932 179.754,155.278 179.754,247.634 v1(180.54,248.42)
B6: R1.2 SW1.1 U5.21 | length 114.5
  Top Layer w0.254: SW1.1@4.1,21.85 4.15,21.85 4.473,21.527 4.473,21.477 5.025,20.925 11.575,20.925 12.35,21.7 44.75,21.7 67.426,21.7 67.575,21.551 67.575,7.033 71.02,3.588 97.213,3.588 99.156,5.531 99.156,7.394 U5.21@99.15,7.4
BOOT0: R70.1 W0.2 | length 2.1
  Top Layer w0.254: W0.2@72.025,17.969 R70.1@72.025,20.1
BOOT1: R75.1 W1.2 | length 2.2
  Top Layer w0.254: R75.1@72,13.625 W1.2@72,15.819
CLK: U1.2 U2.2 U3.2 U4.2 U5.39 | length 626.9
  Top Layer w0.254: U2.2@10.175,146.225 10.175,147.731 10.975,148.531 v1(10.975,148.977) ; U4.2@81.647,253.004 v1(84.07,253.004) ; U5.39@99.65,15.5 99.65,18.067 v1(99.69,18.107) ; v1(102.835,30.996) 108.245,30.996 108.299,31.05 U1.2@108.353,30.996 ; v1(179.3,135.875) 179.837,136.412 179.837,137.662 U3.2@179.825,137.675
  Bottom Layer w0.254: v1(99.69,18.107) 102.835,21.252 102.835,29.432 v1(102.835,30.996) 27.314,30.996 12.425,30.996 10.975,32.446 v1(10.975,148.977) 10.975,251.85 12.129,253.004 v1(84.07,253.004) 177.896,253.004 179.3,251.6 v1(179.3,135.875)
D1_N: R71.2 U5.32 | length 30.3
  Top Layer w0.254: U5.32@101.95,12.2 101.958,12.192 121.69,12.192 123.882,14.383 130.053,14.383 130.202,14.235 130.202,13.798 R71.2@130.625,13.375
D1_P: R72.2 U5.33 | length 30.3
  Top Layer w0.254: U5.33@101.95,12.7 121.48,12.7 123.671,14.891 130.053,14.891 130.202,15.04 130.202,15.477 R72.2@130.625,15.9
D_N: P4.2 P7.2 R71.1 | length 47
  Top Layer w0.381: R71.1@133.525,13.375 133.884,13.734 133.884,14.097 134.108,14.32 134.532,14.32 136.824,12.028 136.824,10.311 139.818,7.317 139.818,6.767 140.941,5.645 141.52,5.645 141.743,5.421 141.743,4.364 P4.2@141.75,4.357 143.037,5.645 145.355,5.645 146.054,6.344 146.054,10.527 147.077,11.55 166.221,11.55 166.682,11.088 166.682,10.773 166.459,10.55 166.41,10.55 166.033,10.172 P7.2@165.73,10.172
D_P: P4.3 P7.3 R72.1 R74.2 | length 49.8
  Top Layer w0.381: R72.1@133.525,15.9 133.884,15.54 133.884,15.178 134.108,14.955 134.795,14.955 137.459,12.291 137.459,11.929 ; R74.2@138.7,12.899 138.599,12.899 138.136,12.436 138.136,12.152 137.913,11.929 137.459,11.929 ; P7.3@168.27,10.172 167.967,10.172 167.59,10.55 167.541,10.55 167.317,10.773 167.317,11.351 166.484,12.185 146.814,12.185 145.419,10.79 145.419,6.607 145.092,6.28 143.037,6.28 P4.3@141.75,7.567 141.743,7.56 141.743,6.503 141.52,6.28 141.204,6.28 140.453,7.03 140.453,7.58 139.954,8.08 137.459,10.574 137.459,11.929